# Altium PCB PCB1.PcbDoc (part 4 of 4)
Units mm, origin at the board's own origin, x right, y up, seen from the top; angles counter-clockwise.
Board outline 200 x 55 mm, 4 copper layers (Top Layer, Power Layer, GND Layer, Bottom Layer), stack 1.714 mm thick; 403 components, 272 nets, 1346 pads, 787 vias.
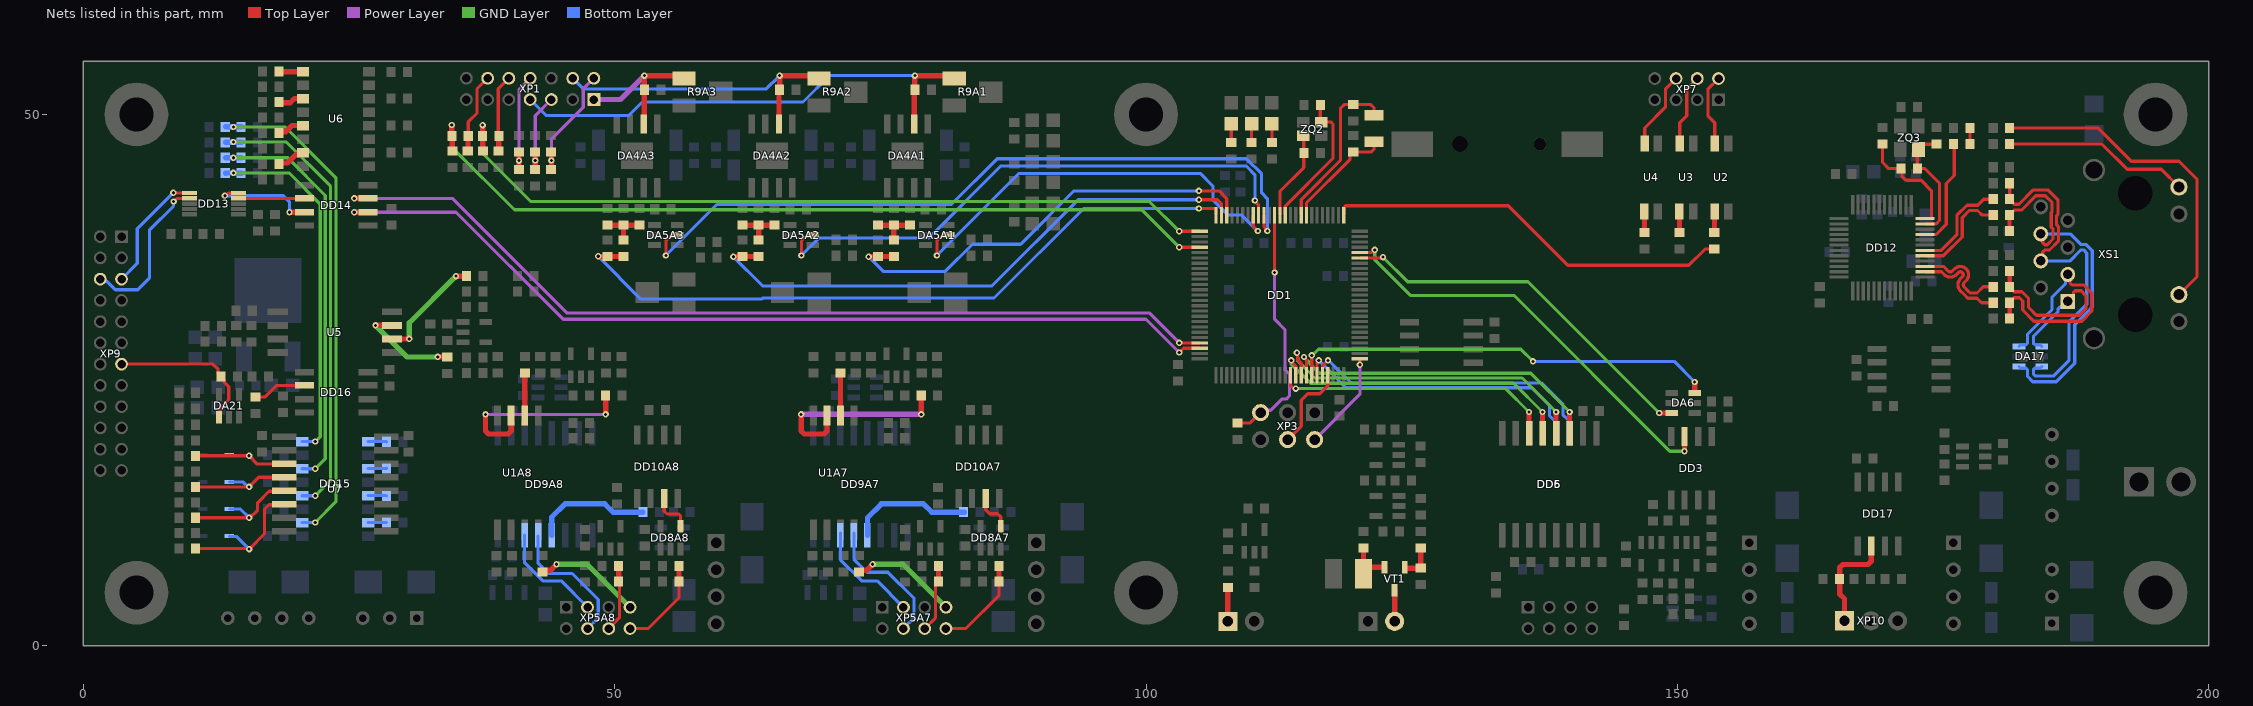
[diagram p6: the nets of this part, all layers, seen from the top]

## Via types
v1: diameter 0.6, hole 0.3, Top Layer to Bottom Layer, tented both sides, 747 vias
v2: diameter 0.6, hole 0.3, Top Layer to Bottom Layer, 36 vias
v3: diameter 0.8, hole 0.4, Top Layer to Bottom Layer, tented both sides, 4 vias

## Nets (pads, with @x,y where several pads share a name; then routed paths per layer and width w, separated by ;. In a path a pad name is that pad's centre, name@x,y a point inside that pad or via, vN(x,y) a via of type N, cw(c..) or ccw(c..) an arc to the next point about the centre after c; other vN are vias at no path point) (continued)
NetDD8A7_4: DD8A7.4 DD10A7.3 | length 3.7
  Top Layer w0.3: DD10A7.3@84.925,13.975 84.925,12.791 85.291,12.425 86.03,12.425 86.325,12.13 DD8A7.4@86.325,11.25
NetDD8A8_4: DD8A8.4 DD10A8.3 | length 3.9
  Top Layer w0.3: DD10A8.3@54.675,13.85 54.675,12.65 54.925,12.4 56.024,12.4 56.2,12.224 DD8A8.4@56.2,11.25
NetDD9A7_12: DD9A7.12 R37A7.1 | length 11.6
  Bottom Layer w0.5: DD9A7.12@73.785,10.4 73.785,12.043 75.092,13.35 79.062,13.35 79.837,12.575 R37A7.1@82.925,12.575
NetDD9A7_13: DD9A7.13 XP5A7.4 | length 12.9
  Bottom Layer w0.3: DD9A7.13@72.515,10.6 72.515,8.16 73.75,6.925 75.7,6.925 78.175,4.45 78.175,2.625 XP5A7.4@77.175,1.625
NetDD9A7_14: DD9A7.14 XP5A7.3 | length 10.3
  Bottom Layer w0.3: DD9A7.14@71.245,10.6 71.245,8.105 73.25,6.1 74.7,6.1 XP5A7.3@77.175,3.625
NetDD9A8_12: DD9A8.12 R37A8.1 | length 11.1
  Bottom Layer w0.5: DD9A8.12@44.07,10.4 44.07,12.091 45.329,13.35 49.069,13.35 49.844,12.575 R37A8.1@52.65,12.575
NetDD9A8_13: DD9A8.13 XP5A8.4 | length 12.7
  Bottom Layer w0.3: DD9A8.13@42.801,10.299 42.801,7.774 43.775,6.8 46,6.8 48.45,4.35 48.45,2.625 XP5A8.4@47.45,1.625
NetDD9A8_14: DD9A8.14 XP5A8.3 | length 10.2
  Bottom Layer w0.3: DD9A8.14@41.53,10.4 41.53,7.819 43.249,6.1 44.975,6.1 XP5A8.3@47.45,3.625
NetDD12_9: DD12.9 R64.2 | length 10.2
  Top Layer w0.3: DD12.9@173.3,38.7 174.05,38.7 174.345,38.7 175.3,39.655 175.3,43.5 176.051,44.251 R64.2@176.051,47.126
NetDD13_4: DD13.4 DD14.6 | length 6.2
  Top Layer w0.3: DD13.4@14.6,42.1 DD14.6@20.8,42.1
NetDD13_5: DD13.5 DD14.7 | length 10.1
  Top Layer w0.3: v1(13.325,42.35) 13.406,42.35 13.656,42.6 DD13.5@14.6,42.6
  Top Layer w0.5: v1(19.4,40.8) DD14.7@20.8,40.8
  Bottom Layer w0.3: v1(13.325,42.35) 18.825,42.35 19.4,41.775 v1(19.4,40.8)
NetDD15_3: DD15.3 R84.2 VD7.1 | length 10.5
  Top Layer w0.3: R84.2@10.575,17.85 10.6,17.875 v1(15.6,17.875) 16.375,17.1 18.87,17.1 DD15.3@18.9,17.13
  Bottom Layer w0.3: VD7.1@13.75,17.94 13.782,17.908 15.567,17.908 v1(15.6,17.875)
NetDD15_4: DD15.4 R78.2 VD6.1 | length 10.7
  Top Layer w0.3: R78.2@10.575,14.95 v1(15.6,14.95) 16.51,15.86 DD15.4@18.9,15.86
  Bottom Layer w0.3: VD6.1@13.75,15.4 15.069,15.4 15.519,14.95 v1(15.6,14.95)
NetDD15_5: DD15.5 R85.2 VD5.1 | length 12
  Top Layer w0.3: R85.2@10.575,12.05 15.681,12.05 16.4,12.769 16.4,13.47 17.476,14.546 18.856,14.546 DD15.5@18.9,14.59
  Bottom Layer w0.3: VD5.1@13.75,12.86 14.79,12.86 v1(15.6,12.05)
NetDD15_6: DD15.6 R79.2 VD4.1 | length 13.8
  Top Layer w0.3: R79.2@10.575,9.15 15.55,9.15 v1(15.6,9.1) 17.05,10.55 17.05,12.85 17.476,13.276 18.856,13.276 DD15.6@18.9,13.32
  Bottom Layer w0.3: VD4.1@13.75,10.3 13.758,10.292 14.408,10.292 v1(15.6,9.1)
NetDD16_6: DD16.6 R99.1 | length 5.1
  Top Layer w0.3: R99.1@16.2,23.4 17.09,23.4 18.19,24.5 DD16.6@20.8,24.5
NetDD17_2: DD17.2 R116.1 XP10.1 | length 9.9
  Top Layer w0.5: XP10.1@165.725,2.35 165.725,4.425 165.275,4.875 165.275,7.357 165.568,7.65 167.946,7.65 168.239,7.943 DD17.2@168.239,9.4
NetR6_2: R6.2 VD1.1 | length 1.8
  Top Layer w0.3: R6.2@108.025,47.35 VD1.1@108.025,49.1
NetR7_2: R7.2 VD2.1 | length 1.7
  Top Layer w0.3: R7.2@109.935,47.35 VD2.1@109.935,49.1
NetR8_2: R8.2 VD3.1 | length 1.8
  Top Layer w0.3: R8.2@111.85,47.31 VD3.1@111.85,49.11
NetR12A1_2: R12A1.2 R13A1.1 R14A1.1 R15A1.1 | length 4.3
  Top Layer w0.5: R13A1.1@74.775,39.575 R12A1.2@76.275,39.575 R15A1.1@77.775,39.575 ; R14A1.1@76.275,38.175 R12A1.2@76.275,39.48
NetR12A2_2: R12A2.2 R13A2.1 R14A2.1 R15A2.1 | length 4.4
  Top Layer w0.5: R13A2.1@62.05,39.575 R12A2.2@63.525,39.575 ; R14A2.1@63.55,38.175 R12A2.2@63.55,39.575 R15A2.1@65.05,39.575
NetR12A3_2: R12A3.2 R13A3.1 R14A3.1 R15A3.1 | length 4.6
  Top Layer w0.5: R13A3.1@49.325,39.575 R12A3.2@50.825,39.575 R15A3.1@52.325,39.575 ; R14A3.1@50.825,38.175 50.825,39.525 R12A3.2@51,39.7
NetR28A7_2: R28A7.2 R31A7.1 XP5A7.6 | length 6.4
  Top Layer w0.3: XP5A7.6@79.175,1.625 80.2,2.65 80.2,5.775 R28A7.2@80.475,6.05
  Top Layer w0.5: R28A7.2@80.475,6.05 R31A7.1@80.475,7.5
NetR28A8_2: R28A8.2 R31A8.1 XP5A8.6 | length 6.3
  Top Layer w0.3: XP5A8.6@49.45,1.625 50.45,2.625 50.45,5.975 R28A8.2@50.375,6.05
  Top Layer w0.5: R28A8.2@50.375,6.05 R31A8.1@50.375,7.5
NetR29A7_2: R29A7.2 R32A7.1 XP5A7.8 | length 9
  Top Layer w0.3: XP5A7.8@81.175,1.625 83.047,1.625 86.175,4.753 R29A7.2@86.175,6.05
  Top Layer w0.5: R29A7.2@86.175,6.05 R32A7.1@86.175,7.5
NetR29A8_2: R29A8.2 R32A8.1 XP5A8.8 | length 8.8
  Top Layer w0.3: XP5A8.8@51.45,1.625 53.175,1.625 56.05,4.5 R29A8.2@56.05,6.05
  Top Layer w0.5: R29A8.2@56.05,6.05 R32A8.1@56.05,7.5
NetR30A7_2: R30A7.2 XP5A7.7 | length 10.2
  Top Layer w0.5: R30A7.2@72.975,6.925 73.15,7.1 73.7,7.1 v1@74.256,7.656
  GND Layer w0.5: v1(74.275,7.675) 77.125,7.675 XP5A7.7@81.175,3.625
NetR30A8_2: R30A8.2 XP5A8.7 | length 10.2
  Top Layer w0.5: R30A8.2@43.225,6.925 43.4,7.1 43.95,7.1 v1@44.506,7.656
  GND Layer w0.5: v1(44.525,7.675) 47.4,7.675 XP5A8.7@51.45,3.625
NetR34A7_1: R34A7.1 U1A7.7 | length 18.7
  Top Layer w0.5: v1(67.55,21.775) 67.55,20.218 67.843,19.925 69.682,19.925 69.975,20.218 U1A7.7@69.975,21.675 ; v1(78.85,21.775) R34A7.1@78.85,23.55
  Power Layer w0.5: v1@67.577,21.775 v1(78.85,21.775)
NetR34A8_1: R34A8.1 U1A8.7 | length 18.7
  Top Layer w0.5: v1(37.85,21.775) 37.85,20.218 38.143,19.925 39.967,19.925 40.26,20.218 U1A8.7@40.26,21.675 ; v1@49.15,21.795 R34A8.1@49.15,23.55
  Power Layer w0.3: v1(37.85,21.775) v1(49.15,21.775)
NetR35A7_1: R35A7.1 U1A7.6 | length 4
  Top Layer w0.5: U1A7.6@71.25,21.675 R35A7.1@71.25,25.65
NetR35A8_1: R35A8.1 U1A8.6 | length 4
  Top Layer w0.5: U1A8.6@41.548,21.675 R35A8.1@41.548,25.638
NetR43_2: R43.2 R45.2 VT1.1 | length 3.5
  Top Layer w0.5: VT1.1@124.346,7.382 124.421,7.307 R45.2@125.871,7.307 ; R45.2@125.85,7.307 R43.2@125.85,9.207
NetR44_2: R44.2 R46.2 VT1.2 | length 4.6
  Top Layer w0.5: R46.2@120.446,6.782 R46.2@120.471,6.807 ; R44.2@120.471,9.207 R46.2@120.471,6.807 ; VT1.2@122.446,7.382 121.046,7.382 R46.2@120.471,6.807
NetR47_1: R47.1 U2.1 | length 2
  Top Layer w0.5: R47.1@153.475,38.875 153.475,38.95 153.5,38.975 U2.1@153.5,40.875
NetR48_1: R48.1 U3.1 | length 2
  Top Layer w0.5: R48.1@150.2,38.875 150.2,38.95 U3.1@150.2,40.875
NetR49_1: R49.1 U4.1 | length 2
  Top Layer w0.5: R49.1@146.9,38.875 U4.1@146.9,40.875
NetR50_1: R50.1 XP8.1 | length 3.2
  Top Layer w0.5: XP8.1@107.7,2.3 R50.1@107.7,5.5
NetR58_1: R58.1 XS1.10 | length 31.2
  Top Layer w0.3: R58.1@181.275,48.712 189.588,48.712 192.7,45.6 197.2,45.6 198.9,43.9 198.9,34.74 XS1.10@197.2,33.04
NetR61_1: R61.1 XS1.12 | length 17.6
  Top Layer w0.3: R61.1@181.275,47.212 189.947,47.212 192.326,44.832 195.538,44.832 XS1.12@197.2,43.17
NetR62_2: R62.2 R64.1 | length 1.5
  Top Layer w0.3: R64.1@177.525,47.212 R62.2@177.525,48.712
NetR80_2: R80.2 U6.1 | length 2.3
  Top Layer w0.3: R80.2@18.425,54.05 R80.2@18.456,54.019
  Top Layer w0.5: R80.2@18.455,54.02 U6.1@20.68,54.02
NetR81_2: R81.2 U6.3 | length 2.4
  Top Layer w0.5: R81.2@18.425,51.1 19.475,51.1 19.88,51.505 20.655,51.505 U6.3@20.68,51.48
NetR82_2: R82.2 U6.5 | length 2.6
  Top Layer w0.5: R82.2@18.425,48.15 18.425,48.2 18.6,48.375 19.075,48.375 19.653,48.953 20.667,48.953 U6.5@20.68,48.94
NetR83_2: R83.2 U6.7 | length 2.8
  Top Layer w0.5: R83.2@18.425,45.25 R83.2@18.425,45.355 ; R83.2@18.425,45.255 18.6,45.43 19.205,45.43 19.97,46.195 20.475,46.195 U6.7@20.68,46.4
NetR88_1: R88.1 U5.7 | length 9.5
  Top Layer w0.5: v1(27.5,30.15) U5.7@29.05,30.15 ; v1(33.35,27.182) R88.1@34.25,27.182
  GND Layer w0.5: v1(27.5,30.15) 30.475,27.175 33.343,27.175 v1(33.35,27.182)
NetR90_1: R90.1 U5.6 | length 10.3
  Top Layer w0.5: U5.6@29.05,28.875 v1(30.675,28.875) ; v1(35.075,34.782) 36.004,34.782 R90.1@36.027,34.759
  GND Layer w0.5: v1(30.675,28.875) 30.675,30.382 v1(35.075,34.782)
NetR95_1: R95.1 U7.1 | length 1.7
  Bottom Layer w0.3: U7.1@26.82,19.21 28.515,19.21 R95.1@28.525,19.2
NetR96_1: R96.1 U7.3 | length 1.7
  Bottom Layer w0.3: U7.3@26.82,16.67 28.495,16.67 R96.1@28.525,16.7
NetR97_1: R97.1 U7.5 | length 1.7
  Bottom Layer w0.3: U7.5@26.82,14.13 28.495,14.13 R97.1@28.525,14.1
NetR98_1: R98.1 U7.7 | length 1.7
  Bottom Layer w0.3: U7.7@26.82,11.59 26.83,11.6 R98.1@28.525,11.6
NetR100_1: R100.1 R104.1 U7.16 | length 34.7
  GND Layer w0.3: v1(14.123,44.5) 19.358,44.5 22.3,41.558 22.3,19.673 21.852,19.225 v1(21.825,19.225)
  Bottom Layer w0.3: U7.16@20.6,19.21 20.608,19.218 21.818,19.218 v1(21.825,19.225)
  Bottom Layer w0.5: R104.1@13.375,44.475 13.388,44.487 14.111,44.487 v1(14.123,44.5) ; v1@14.123,44.475 R100.1@14.875,44.475
NetR101_1: R101.1 R105.1 U7.14 | length 39
  GND Layer w0.3: v1(14.123,45.918) 19.231,45.918 22.775,42.375 22.775,17.6 v1(21.825,16.65)
  Bottom Layer w0.3: U7.14@20.6,16.67 20.61,16.66 21.815,16.66 v1(21.825,16.65)
  Bottom Layer w0.5: R105.1@13.375,45.925 R101.1@14.875,45.925
NetR102_1: R102.1 R106.1 U7.12 | length 43.3
  GND Layer w0.3: v1(14.123,47.4) 19.102,47.4 23.275,43.227 23.275,15.575 v1(21.825,14.125)
  Bottom Layer w0.3: U7.12@20.605,14.125 v1(21.825,14.125)
  Bottom Layer w0.5: R106.1@13.375,47.375 13.387,47.387 14.111,47.387 v1(14.123,47.4) ; v1@14.123,47.375 R102.1@14.875,47.375
NetR103_1: R103.1 R107.1 U7.10 | length 47.5
  GND Layer w0.3: v1(14.123,48.818) 19.005,48.818 23.775,44.049 23.775,13.55 v1(21.825,11.6)
  Bottom Layer w0.3: U7.10@20.6,11.59 20.605,11.595 21.695,11.595 v1@21.7,11.6
  Bottom Layer w0.5: R107.1@13.375,48.825 R103.1@14.875,48.825
NetU2_4: U2.4 XP7.2 | length 6.8
  Top Layer w0.3: U2.4@153.525,47.275 153.525,49.225 152.875,49.875 152.875,52.375 XP7.2@153.875,53.375
NetU3_4: U3.4 XP7.4 | length 6.8
  Top Layer w0.3: U3.4@150.225,47.275 150.225,49.225 150.878,49.878 150.878,52.378 XP7.4@151.875,53.375
NetU4_4: U4.4 XP7.6 | length 7.3
  Top Layer w0.3: U4.4@146.925,47.275 146.925,48.725 148.875,50.675 148.875,52.375 XP7.6@149.875,53.375
NetVT1_3: VT1.3 XP6.2 | length 3
  Top Layer w0.3: XP6.2@123.371,2.257 XP6.2@123.396,2.282
  Top Layer w0.5: XP6.2@123.396,2.282 VT1.3@123.396,5.232
NRST: C21.1 DD1.14 XP3.5 | length 23.4
  Top Layer w0.3: C21.1@108.708,20.975 109.82,20.975 XP3.5@110.785,21.94 ; v1(112.1,35.125) DD1.14@112.1,40.525
  Power Layer w0.3: XP3.5@110.785,21.94 111.016,22.171 111.721,22.171 112.76,23.21 113.185,23.21 113.5,23.525 113.5,25.553 113.075,25.978 113.075,29.75 112.1,30.725 v1(112.1,35.125)
OSC0: C23.1 DD1.12 ZQ2.1 | length 13.3
  Top Layer w0.3: DD1.12@113.1,40.525 113.1,41.375 117.6,45.875 117.6,49.099 117.424,49.275 ZQ2.1@116.5,49.275 116.4,49.375 C23.1@116.4,50.875
OSC1: C25.1 DD1.13 ZQ2.3 | length 8.4
  Top Layer w0.3: DD1.13@112.6,40.525 112.6,42.75 114.85,45 114.85,46.225 C25.1@114.775,46.3 ; ZQ2.3@114.8,47.975 114.85,47.925 C25.1@114.85,46.375
OSC32_0: C22.1 DD1.8 ZQ1.1 | length 10.5
  Top Layer w0.3: DD1.8@115.1,40.525 115.1,41.675 119.207,45.782 119.207,46.2 119.482,46.475 121.2,46.475 121.45,46.725 ZQ1.1@121.45,47.425
OSC32_1: C24.1 DD1.9 ZQ1.2 | length 15.7
  Top Layer w0.3: DD1.9@114.6,40.525 114.6,41.978 118.3,45.678 118.3,50.575 118.65,50.925 C24.1@119.5,50.925 121.15,50.925 121.45,50.625 ZQ1.2@121.45,49.925
PD1_A: R10A3.2 R11A3.1 XP1.2 | length 11
  Top Layer w0.5: R10A3.2@44.05,44.85 v1(44.05,45.662) R11A3.1@44.05,46.475
  Power Layer w0.3: v1(44.05,45.662) 44.05,47.675 47.05,50.675 47.05,52.4 XP1.2@48.05,53.4
PD1_ADC: C32A3.1 DD1.25 R14A3.2 | length 66.4
  Top Layer w0.3: v1(48.45,36.645) v1@48.46,36.635 ; R14A3.2@50.815,36.635 R14A3.2@50.825,36.625 ; v1(104.975,41.15) 106.6,41.15 DD1.25@106.6,40.525
  Top Layer w0.5: v1@48.46,36.635 R14A3.2@50.815,36.635
  Bottom Layer w0.3: v1(48.45,36.645) 52.472,32.623 63.825,32.623 63.926,32.725 85.7,32.725 94.125,41.15 v1(104.975,41.15)
PD1_C: C27A3.2 DA4A3.2 R9A3.1 XP1.1 | length 14.1
  Top Layer w0.5: DA4A3.2@52.75,49.105 52.775,49.13 52.775,52.3 C27A3.2@52.8,52.325 v1(52.8,53.65) 52.819,53.631 56.269,53.631 R9A3.1@56.525,53.375
  Power Layer w0.5: XP1.1@48.05,51.4 50.55,51.4 v1(52.8,53.65)
PD1_ERR: DA5A3.5 DD1.16 | length 70.3
  Top Layer w0.3: v1(54.825,36.725) 54.825,38.114 55.236,38.525 55.775,38.525 DA5A3.5@55.9,38.65 ; DD1.16@111.1,40.525 111.1,39.431 111.425,39.106 v1(111.425,39.025)
  Bottom Layer w0.3: v1(54.825,36.725) 59.625,41.525 81.693,41.525 85.993,45.825 109.449,45.825 110.875,44.399 110.875,42.612 111.425,42.062 v1(111.425,39.025)
PD2_A: R10A2.2 R11A2.1 XP1.5 | length 8
  Top Layer w0.5: R10A2.2@42.525,44.85 v1(42.525,45.662) R11A2.1@42.525,46.475
  Power Layer w0.3: v1(42.525,45.662) 42.525,49.875 XP1.5@44.05,51.4
PD2_ADC: C32A2.1 DD1.24 R14A2.2 | length 54.1
  Top Layer w0.3: v1(104.975,41.975) 106.725,41.975 107.1,41.6 DD1.24@107.1,40.525
  Top Layer w0.5: v1(61.175,36.6) 62.05,36.6 C32A2.1@62.075,36.575 ; C32A2.1@62.05,36.625 R14A2.2@63.55,36.625
  Bottom Layer w0.3: v1(61.175,36.6) 63.925,33.85 85.5,33.85 93.625,41.975 v1(104.975,41.975)
PD2_C: C27A2.2 DA4A2.2 R9A2.1 XP1.4 | length 28.8
  Top Layer w0.5: DA4A2.2@65.466,49.105 65.466,52.266 C27A2.2@65.525,52.325 v1(65.525,53.65) 68.9,53.65 R9A2.1@69.225,53.325
  Bottom Layer w0.3: XP1.4@46.05,53.4 47.05,52.4 64.275,52.4 v1(65.525,53.65)
PD2_ERR: DA5A2.5 DD1.17 | length 53.4
  Top Layer w0.3: v1(67.575,36.725) 67.575,38.095 68.005,38.525 68.733,38.525 DA5A2.5@68.883,38.675 ; v1(110.25,41.9) 110.25,41.819 110.6,41.469 DD1.17@110.6,40.525
  Bottom Layer w0.3: v1(67.575,36.725) 69.214,38.364 79.539,38.364 86.325,45.15 109.438,45.15 110.25,44.338 v1(110.25,41.9)
PD3_A: R10A1.2 R11A1.1 XP1.8 | length 9.8
  Top Layer w0.5: R10A1.2@41,44.85 v1(41,45.65) R11A1.1@41,46.475
  Power Layer w0.3: v1(41,45.65) 41,52.35 XP1.8@42.05,53.4
PD3_ADC: C32A1.1 DD1.23 R14A1.2 | length 41.6
  Top Layer w0.3: v1(104.975,42.8) 106.881,42.8 107.6,42.081 DD1.23@107.6,40.525
  Top Layer w0.5: v1(73.9,36.6) C32A1.1@74.775,36.6 ; C32A1.1@74.775,36.625 R14A1.2@76.275,36.625
  Bottom Layer w0.3: v1(73.9,36.6) 75.275,35.225 81.125,35.225 83.675,37.775 88.2,37.775 93.225,42.8 v1(104.975,42.8)
PD3_C: C27A1.2 DA4A1.2 R9A1.1 XP1.7 | length 46.8
  Top Layer w0.5: DA4A1.2@78.2,49.105 78.2,52.275 C27A1.2@78.25,52.325 v1(78.25,53.65) 78.269,53.631 81.694,53.631 R9A1.1@81.95,53.375
  Bottom Layer w0.3: XP1.7@42.05,51.4 43.55,49.9 51.345,49.9 52.615,51.17 67.72,51.17 70.2,53.65 v1(78.25,53.65)
PD3_ERR: DA5A1.5 DD1.18 | length 40.9
  Top Layer w0.3: v1(80.325,36.725) 80.325,38.12 80.73,38.525 81.343,38.525 DA5A1.5@81.492,38.675 ; DD1.18@110.1,40.525 110.1,39.45 v1(110.525,39.025)
  Bottom Layer w0.3: v1(80.325,36.725) 88.05,44.45 105.108,44.45 106.296,43.263 106.296,41.979 107.75,40.525 109.025,40.525 v1(110.525,39.025)
PMO_HW: DA21.1 R113.2 XP9.13 | length 14.6
  Top Layer w0.3: XP9.13@3.6,26.5 12.2,26.5 12.684,26.016 12.684,25.621 13.23,25.075 13.23,24.834 13.688,24.376 13.688,23.177 12.883,22.372 12.883,21.625 DA21.1@12.758,21.5
POWER_IND: DD1.1 R47.2 | length 38.6
  Top Layer w0.3: DD1.1@118.6,40.525 118.6,41.224 118.776,41.4 134.1,41.4 139.7,35.8 151.075,35.8 152.6,37.325 R47.2@153.475,37.325
PS_A: DD1.96 DD3.3 | length 40.4
  Top Layer w0.3: DD1.96@120.125,37 121.211,37 121.461,37.25 v1(121.525,37.25)
  Top Layer w0.5: v1(150.675,18.3) 150.678,18.303 150.678,19.697 DD3.3@150.681,19.7
  GND Layer w0.3: v1(121.525,37.25) 121.525,36.325 124.875,32.975 134.625,32.975 149.3,18.3 v1(150.675,18.3)
PS_D: DA6.3 DD1.95 | length 35.5
  Top Layer w0.3: DD1.95@120.125,36.5 122.144,36.5 122.219,36.575 v1(122.3,36.575)
  Top Layer w0.5: v1(148.3,21.9) DA6.3@149.475,21.9
  GND Layer w0.3: v1(122.3,36.575) 124.625,34.25 135.95,34.25 v1(148.3,21.9)
PS_ERR1: DD1.65 DD5.14 | length 26.4
  Top Layer w0.3: DD1.65@113.6,25.475 113.6,24.514 113.855,24.259 114.043,24.259 v1(114.1,24.202) ; v1(136.042,22) v1@136.044,21.998 ; DD5.14@136.044,20.012 DD5.14@136.046,20.01
  Top Layer w0.5: DD5.14@136.044,20.012 v1@136.044,21.998
  GND Layer w0.3: v1(114.1,24.202) 114.102,24.2 133.842,24.2 v1(136.042,22)
PS_ERR2: DD1.66 DD5.13 | length 29.4
  Top Layer w0.3: v1(113.675,26.85) 113.732,26.793 113.732,26.692 114.1,26.324 DD1.66@114.1,25.475 ; v1(137.312,22) v1@137.314,21.998 ; DD5.13@137.314,20.012 DD5.13@137.316,20.01
  Top Layer w0.5: DD5.13@137.314,20.012 v1@137.314,21.998
  GND Layer w0.3: v1(113.675,26.85) 113.632,26.807 113.632,26.551 115.485,24.698 134.614,24.698 v1(137.312,22)
PS_ERR3: DD1.67 DD5.12 | length 31.3
  Top Layer w0.3: v1(114.2,27.575) 114.257,27.518 114.257,27.116 114.275,27.099 114.275,26.924 114.6,26.599 DD1.67@114.6,25.475
  Top Layer w0.5: DD5.12@138.586,20.01 v1(138.586,22)
  GND Layer w0.3: v1(114.2,27.575) 114.257,27.518 114.257,27.116 114.275,27.099 114.275,26.825 115.906,25.194 135.392,25.194 v1(138.586,22)
PS_ON: DD1.68 DD5.11 | length 31
  Top Layer w0.3: v1(114.87,27.177) 114.87,27.096 115.1,26.866 DD1.68@115.1,25.475
  Top Layer w0.5: DD5.11@139.856,20.01 v1(139.856,22)
  GND Layer w0.3: v1(114.87,27.177) 115.463,26.584 115.463,26.498 116.317,25.644 136.212,25.644 v1(139.856,22)
PS_SEL_D: DA6.6 DD1.69 | length 40.4
  Top Layer w0.3: DD1.69@115.6,25.475 115.6,27.32 v1(115.605,27.325)
  Top Layer w0.5: DA6.6@151.625,23.8 v1(151.625,24.825)
  GND Layer w0.3: v1(115.605,27.325) 115.661,27.325 116.235,27.9 135.277,27.9 v1(136.419,26.758)
  Bottom Layer w0.3: v1(136.419,26.758) 149.692,26.758 v1(151.625,24.825)
RD_N: DA17.4 R54.1 R57.2 XS1.6 | length 35.9
  Top Layer w0.3: R57.2@181.275,40.525 181.275,40.575 181.698,40.998 182.379,40.998 183.729,42.347 184.635,42.347 185.25,41.732 185.25,40.806 185.19,40.746 185.19,39.394 185.35,39.234 185.35,38.281 184.806,37.737 184.558,37.737 184.382,37.913 184.382,38.575 XS1.6@184.2,38.757
  Top Layer w0.381: R54.1@181.275,39.025 R57.2@181.275,40.525
  Bottom Layer w0.3: DA17.4@182.15,26.275 182.275,26.15 182.772,26.15 182.948,25.974 182.948,25.346 183.448,24.846 185.646,24.846 187.4,26.6 187.4,30.217 188.892,31.708 188.892,31.762 189.035,31.905 189.035,37.167 188.437,37.764 187.948,37.764 186.955,38.757 XS1.6@184.2,38.757
RD_P: DA17.3 R55.1 R60.2 XS1.4 | length 35
  Top Layer w0.3: R55.1@181.275,43.525 R60.2@181.275,42.025 181.275,41.975 181.698,41.552 182.15,41.552 183.499,42.901 184.864,42.901 185.804,41.962 185.804,40.576 185.69,40.462 185.69,39.601 185.85,39.441 185.85,38.074 185.013,37.237 184.558,37.237 184.382,37.062 184.382,36.4 XS1.4@184.2,36.217
  Bottom Layer w0.3: XS1.4@184.2,36.217 186.955,36.217 187.986,37.249 188.223,37.249 188.519,36.953 188.519,32.119 186.846,30.446 186.846,26.829 185.417,25.4 183.678,25.4 183.502,25.576 183.502,25.974 183.678,26.15 184.175,26.15 DA17.3@184.3,26.275
Rx232: DD1.48 DD14.2 | length 86.5
  Top Layer w0.3: v1(103.125,27.6) 103.525,28 DD1.48@105.075,28
  Top Layer w0.5: v1(25.5,40.8) DD14.2@26.8,40.8
  Power Layer w0.3: v1(25.5,40.8) 35.075,40.8 45.15,30.725 100,30.725 v1(103.125,27.6)
Rx232_HW: DD13.7 XP9.6 | length 15.3
  Top Layer w0.3: v1(8.5,41.8) 8.526,41.8 8.826,42.1 DD13.7@10,42.1
  Bottom Layer w0.3: XP9.6@1.6,34.5 1.985,34.5 2.219,34.267 2.252,34.267 3.019,33.5 5.123,33.5 6.219,34.596 6.219,39.1 8.493,41.374 8.493,41.793 v1(8.5,41.8)
RxCAN: DD1.70 DD6.5 | length 27.8
  Top Layer w0.3: DD1.70@116.1,25.475 116.1,26.619 116.25,26.769 v1(116.25,26.85)
  Bottom Layer w0.3: v1(116.25,26.85) 117.372,25.728 118.812,24.288 136.299,24.288 137.956,22.63 137.956,21.668 138.436,21.188 138.436,20.16 DD6.5@138.586,20.01
RXI_N: DD12.5 R57.1 | length 9.4
  Top Layer w0.3: DD12.5@173.3,36.7 175.031,36.7 176.8,38.469 176.8,40.293 177.465,40.958 178.243,40.958 178.675,40.525 R57.1@179.725,40.525
RXI_P: DD12.6 R60.1 | length 9.5
  Top Layer w0.3: DD12.6@173.3,37.2 174.824,37.2 176.3,38.676 176.3,40.5 177.257,41.458 178.258,41.458 178.825,42.025 R60.1@179.725,42.025
SWCLK: DD1.76 XP3.2 | length 9.4
  Top Layer w0.3: v1(120.125,26.45) DD1.76@120.125,27
  Power Layer w0.3: XP3.2@115.865,19.4 120.125,23.66 v1(120.125,26.45)
SWDIO: DD1.72 XP3.4 | length 8.3
  Top Layer w0.3: XP3.4@113.325,19.4 114.6,20.675 114.6,23.09 115.231,23.721 116.343,23.721 117.1,24.478 DD1.72@117.1,25.475
T1: R17A4.2 R18A4.1 XP1.10 | length 7.3
  Top Layer w0.3: R18A4.1@39.055,47.972 39.055,52.405 XP1.10@40.05,53.4
  Top Layer w0.5: R17A4.2@39.078,46.572 39.103,46.597 39.103,47.947 R18A4.1@39.128,47.972
T1_ADC: C36A4.1 DD1.26 R18A4.2 | length 75.6
  Top Layer w0.3: v1(103.125,39) DD1.26@105.075,39
  Top Layer w0.5: v1(37.578,48.997) R18A4.2@37.578,47.972 37.603,47.947 37.603,46.597 C36A4.1@37.628,46.572
  GND Layer w0.3: v1@37.65,49 37.65,46.275 42.125,41.8 100.325,41.8 v1(103.125,39)
T2: R17A5.2 R18A5.1 XP1.12 | length 7.6
  Top Layer w0.3: R18A5.1@36.225,47.975 36.225,49.3 37.05,50.125 37.05,52.4 XP1.12@38.05,53.4
  Top Layer w0.5: R17A5.2@36.175,46.575 36.2,46.6 36.2,47.95 R18A5.1@36.225,47.975
T2_ADC: C36A5.1 DD1.29 R18A5.2 | length 78.8
  Top Layer w0.3: v1(103.125,37.5) DD1.29@105.075,37.5
  Top Layer w0.5: v1(34.675,49) R18A5.2@34.675,47.975 34.725,47.925 C36A5.1@34.725,46.575
  GND Layer w0.3: v1(34.675,49) 34.675,46.925 40.575,41.025 99.6,41.025 v1(103.125,37.5)
TD_N: DA17.6 R52.1 R56.2 XS1.3 | length 25.1
  Top Layer w0.3: R56.2@181.275,32.507 181.454,32.507 181.698,32.751 182.197,32.751 182.5,32.447 182.5,31.599 183.554,30.546 188.046,30.546 189,31.5 189,33.183 188.229,33.954 187.125,33.954 186.949,34.13 186.949,34.738 XS1.3@186.74,34.947
  Top Layer w0.381: R52.1@181.275,30.778 R56.2@181.275,32.277
  Bottom Layer w0.3: DA17.6@182.15,28.175 182.275,28.3 182.772,28.3 182.948,28.476 182.948,29.331 185.25,31.633 185.25,32.812 186.531,34.093 186.531,34.738 XS1.3@186.74,34.947
TD_P: DA17.1 R53.1 R59.2 XS1.1 | length 20.6
  Top Layer w0.3: R59.2@181.275,33.778 181.275,33.728 181.698,33.305 182.426,33.305 183.054,32.676 183.054,31.829 183.783,31.1 187.817,31.1 188.446,31.729 188.446,32.954 188,33.4 187.447,33.4 187.271,33.225 187.271,32.939 XS1.1@186.74,32.407
  Top Layer w0.381: R59.2@181.275,33.778 R53.1@181.275,35.278
  Bottom Layer w0.3: DA17.1@184.3,28.175 184.175,28.3 183.678,28.3 183.502,28.476 183.502,29.102 185.804,31.404 185.804,31.682 185.98,31.857 186.19,31.857 XS1.1@186.74,32.407
Tx232: DD1.47 DD14.3 | length 86.5
  Top Layer w0.3: v1(103.125,28.5) 104.362,28.5 DD1.47@105.075,28.5
  Top Layer w0.5: v1(25.5,42.1) DD14.3@26.8,42.1
  Power Layer w0.3: v1(25.5,42.1) 34.724,42.1 45.499,31.325 100.3,31.325 v1(103.125,28.5)
Tx232_HW: DD13.6 XP9.5 | length 11.6
  Top Layer w0.3: v1@8.481,42.608 9.963,42.608 DD13.6@9.971,42.6
  Bottom Layer w0.3: XP9.5@3.6,34.508 5.082,35.99 5.082,39.246 v1@8.473,42.637
  other v1: 8.481,42.637
TxCAN: DD1.71 DD6.6 | length 28.4
  Top Layer w0.3: DD1.71@116.6,25.475 116.6,26.325 v1(117.125,26.85)
  Bottom Layer w0.3: v1(117.125,26.85) 117.175,26.85 118.06,25.965 119.287,24.738 137.212,24.738 139.231,22.719 139.231,21.753 139.706,21.278 139.706,20.16 DD6.6@139.856,20.01
TXO_N: DD12.2 R56.1 | length 9.4
  Top Layer w0.3: DD12.2@173.3,35.2 174.827,35.2 174.838,35.2 175.042,34.996 175.114,34.924 ; 175.115,34.923 ccw(c175.681,35.488) 176.247,34.923 176.437,35.112 cw(c176.631,34.918) 176.826,35.112 cw(c176.631,34.918) 176.826,34.723 176.636,34.534 ccw(c177.202,33.968) 176.636,33.402 177.033,33.005 177.338,32.7 177.44,32.7 178.2,32.7 178.623,32.277 R56.1@179.725,32.277
TXO_P: DD12.3 R59.1 | length 9.5
  Top Layer w0.3: DD12.3@173.3,35.7 175.045,35.7 175.186,35.559 175.396,35.349 175.469,35.276 ccw(c175.681,35.488) 175.893,35.276 176.083,35.466 cw(c176.631,34.918) 177.179,35.466 cw(c176.631,34.918) 177.181,34.371 176.989,34.18 ccw(c177.202,33.968) 176.989,33.756 177.387,33.359 177.545,33.2 177.94,33.2 178.2,33.2 178.778,33.778 R59.1@179.725,33.778
XSCI: DD12.12 R63.2 R65.1 | length 11
  Top Layer w0.3: R65.1@169.3,47.2 169.3,45.5 169.9,44.9 R63.2@171.025,44.9 171.149,44.776 171.149,44.151 171.5,43.8 172.934,43.8 173.9,42.834 173.9,40.2 DD12.12@173.3,40.2
XSCO: C85.1 DD12.11 R63.1 ZQ3.1 | length 11.4
  Top Layer w0.3: DD12.11@173.3,39.7 174.345,39.7 174.665,40.02 174.665,43.535 173.3,44.9 R63.1@172.575,44.9 172.575,46.575 ZQ3.1@172.7,46.7 172.7,46.75 173.15,47.2 C85.1@174.375,47.2
pads on no net: DA1.3 DA1.5 DA1.8 DA2.5 DA2.8 DA4A1.5 DA4A2.5 DA4A3.5 DA18.5 DA19.3 DA19.5 DA19.8 DD1.51 DD1.52 DD1.83 DD1.84 DD1.85 DD1.86 DD1.87 DD1.97 DD1.98 DD4.1 DD6.1 DD6.4 DD6.10 DD6.14 DD6.15 DD7A7.1 DD7A8.1 DD8A7.1 DD8A8.1 DD9A7.7 DD9A7.11 DD9A8.7 DD9A8.11 DD11.1 DD12.18 DD12.19 DD12.21 DD12.34 DD12.35 DD12.37 DD12.38 DD12.39 DD12.40 DD12.41 DD12.42 DD12.43 DD12.44 DD15.7 XP1.14 XP3.6 XP7.7 XP7.8 XS1. XS1.7 XS1.8

## Polygon pours and split planes (outlines as drawn)
GND on Top Layer "NONET_L-01_P-001" (solid, remove dead copper, pour order 24): 25.5,55 32,55 32,9.3 25.5,9.3
GND_DRVA7 on Top Layer "GND_DRVA7_L01_P023" (solid, remove dead copper, pour order 23): 66.75,15.5 66.75,0 88.125,0 88.125,15.5
GND_DRVA8 on Top Layer "GND_DRVA8_L01_P022" (solid, remove dead copper, pour order 22): 39.75,15.5 36.325,12.075 36.325,0 58,0 58,15.5
AGND on Top Layer "AGND_L01_P017" (solid, remove dead copper, pour order 17): 34,55 34,22.275 38.275,18 93,18 93,30.5 88.375,35.125 88.375,55
GND_HW on Top Layer "GND_HW_L01_P008" (solid, remove dead copper, pour order 8): 9,0 9,6.5 6.5,9 0,9 0,46 6,46 9,49 9,55 22,55 22,7.545 17.55,3.095 17.55,0
GND on Top Layer "GND_L01_P006" (solid, remove dead copper, pour order 6): 190.825,15.875 190.825,22.125 193.2,24.5 200,24.5 200,45.497 193,45.497 190.5,47.997 190.5,54.997 158.75,54.997 158.75,45.75 155.5,42.5 146.25,42.5 143,45.75 143,55 104.375,55 104.375,48.375 102,46 97.875,46 95.5,48.375 95.5,55 90.625,55 90.625,35.25 94.917,30.958 94.917,17.95 94.917,17.5 94.917,17.434 104.375,7.976 104.375,0 128.5,0 128.5,13.5 133,18 152,18 159.925,18 164.175,13.75 181.425,13.75 183.55,15.875
GND_FS on Top Layer "NONET_L-01_P-001" (solid, remove dead copper, pour order 25): 164.175,11 162.5,9.325 162.5,0 174.25,0 174.25,11
GND_PS on Top Layer "GND_PS_L01_P013" (solid, remove dead copper, pour order 13): 131.125,0 131.125,13.25 133.375,15.5 155.081,15.5 155.081,0
AGND_HW on Top Layer "NONET_L-01_P-001" (solid, pour order 21): 12.566,29.195 12.566,27.056 13.496,26.126 16.874,26.126 16.874,24.87 18.098,24.87 18.098,26.126 19.253,27.28 19.253,29.195
GND_DRVA7 on Bottom Layer "GND_DRVA7_L04_P001" (solid, remove dead copper, pour order 1): 66.75,15.5 66.75,0.003 88.125,0.003 88.125,15.5
GND on Bottom Layer "GND_L04_P009" (solid, remove dead copper, pour order 9): 200,24.5 193.2,24.5 190.61,21.91 178.96,21.91 174.25,17.2 174.25,13.75 164.175,13.75 159.925,18 133,18 128.5,13.5 128.5,0 104.4,0 104.4,7.95 94.35,18 38.374,18 33,12.626 33,9.3 25.5,9.3 25.5,19 25.5,55 32,55 32,26.5 82.5,26.5 90.625,34.625 90.625,55 95.5,55 95.5,48.375 97.877,45.998 101.998,45.998 104.375,48.375 104.375,55 143,55 143,45.75 146.25,42.5 155.5,42.5 158.75,45.75 158.75,55 190.5,55 190.5,49 193.502,45.998 200,45.998
AGND on Bottom Layer "AGND_L04_P005" (solid, remove dead copper, pour order 5): 34,55 34,28.5 52.499,28.5 73.5,28.5 82.25,28.5 88.375,34.625 88.375,55
GND_DRVA8 on Bottom Layer "GND_DRVA8_L04_P003" (solid, remove dead copper, pour order 3): 39.75,15.5 36.325,12.075 36.325,0 58,0 58,15.5
GND_HW on Bottom Layer "GND_HW_L04_P015" (solid, remove dead copper, pour order 15): 9,0 9,6.5 6.5,9 0,9 0,46 6,46 9,49 9,55 22,55 22,8.75 18.788,8.75 17.55,7.512 17.55,0
GND_FS on Bottom Layer "NONET_L-01_P-001" (solid, remove dead copper, pour order 19): 164.175,11 162.5,9.325 162.5,0 174.25,0 174.25,11
GND_PS on Bottom Layer "GND_PS_L04_P012" (solid, remove dead copper, pour order 12): 131.125,0 131.125,13.25 133.375,15.5 155.081,15.5 155.081,0
GND on GND Layer "GND_L03_P018" (solid, remove dead copper, pour order 18): 25.5,55 32,55 32,26.5 75.875,26.5 78.325,28.95 84.95,28.95 90.626,34.626 90.626,55 95.5,55 95.5,48.375 97.877,45.998 101.998,45.998 104.375,48.375 104.375,55 143,55 143,45.744 146.247,42.497 155.497,42.497 158.75,45.75 158.75,55 190.5,55 190.5,49 193.502,45.998 200,45.998 200,24.5 193.175,24.5 190.825,22.15 190.825,15.875 183.55,15.875 181.425,13.75 164.175,13.75 159.925,18 133,18 128.5,13.5 128.5,0 104.4,0 104.4,7.95 94.35,18 38.51,18 33,12.49 33,9.3 25.5,9.3
AGND on GND Layer "AGND_L03_P004" (solid, remove dead copper, pour order 4): 34,55 34,28.5 82.25,28.5 88.375,34.625 88.375,55
GND_FS on GND Layer "NONET_L-01_P-001" (solid, remove dead copper, pour order 20): 164.175,11 162.5,9.325 162.5,0 174.25,0 174.25,11
GND_DRVA7 on GND Layer "GND_DRVA7_L03_P000" (solid, remove dead copper, pour order 0): 66.75,14.25 66.75,0 88.125,0 88.125,14.25
GND_DRVA8 on GND Layer "GND_DRVA8_L03_P002" (solid, remove dead copper, pour order 2): 38.5,14.25 36.325,12.075 36.325,0 58,0 58,14.25
GND_HW on GND Layer "GND_HW_L03_P016" (solid, remove dead copper, pour order 16): 9,0 9,6.5 6.5,9 0,9 0,46 6,46 9,49 9,55 22,55 22,7.55 17.55,3.1 17.55,0

## Keep-outs
Top Layer:
  lines w0.2: 172.875,13.45 172.875,20.925 174.013,22.063 181.5,22.063 ; 155.861,26.65 156.2,26.311 159.305,26.311 159.656,26.662 159.656,27.951 159.294,28.312 156.211,28.312 155.861,27.962 155.861,26.65 ; 155.871,18.389 156.21,18.05 159.315,18.05 159.674,18.409 159.674,19.681 159.304,20.051 156.221,20.051 155.871,19.701 155.871,18.389
GND Layer:
  lines w0.2: 154.8,42.775 154.8,27.711 156.23,26.281 159.274,26.281 159.656,26.662 159.656,27.944 157.1,30.5 157.1,44.65 ; 155.871,17.874 155.871,19.701 156.221,20.051 159.304,20.051 159.674,19.681 159.674,17.874
Bottom Layer:
  lines w0.2: 155.871,17.874 155.871,27.973 156.211,28.312 159.287,28.312 159.675,27.925 159.675,17.874

## Other copper
Top Layer:
  pour cut-out: 184.725,21 184.112,20.387 184.112,19.363 184.682,18.793 185.768,18.793 186.35,19.375 186.35,20.375 185.725,21
  pour cut-out: 13.075,3.7 12.462,3.087 12.462,2.063 13.075,1.45 14.075,1.45 14.7,2.075 14.7,3.075 14.075,3.7
GND Layer:
  pour cut-out: 98.75,11.125 98.75,13.5 128.75,13.5 128.75,11.125
  pour cut-out: 184.725,21 184.1,20.375 184.1,19.375 184.725,18.75 185.725,18.75 186.35,19.375 186.35,20.375 185.725,21
  pour cut-out: 13.075,3.7 12.45,3.075 12.45,2.075 13.075,1.45 14.075,1.45 14.7,2.075 14.7,3.075 14.075,3.7
Bottom Layer:
  pour cut-out: 13.075,3.7 12.45,3.075 12.45,2.075 13.075,1.45 14.075,1.45 14.7,2.075 14.7,3.075 14.075,3.7

## Silkscreen, mask and mechanical layers (free items; w line width, h text height)
Top Overlay:
  drawing of 28 lines, arcs and shapes, not listed
  text "SCALE" at 56.498,47.439 h1.3
  text "SCALE" at 69.361,47.439 h1.3
  text "SCALE" at 82.235,47.439 h1.3
  text "OVERPOW" at 52.795,28.641 h1.3
  text "OVERPOW" at 65.52,28.641 h1.3
  text "OVERPOW" at 78.345,28.616 h1.3
  text "Low-profile laser / Control board / Rev.4" at 137.975,24.325 h3
Bottom Overlay:
  lines w0.2: 9.688,25.337 9.85,25.175 ; 9.85,25.175 9.875,25.175 9.85,25.175
Top Assy:
  circle w0.2: c100,50 r1.6
  circle w0.2: c100,5 r1.6
  circle w0.2: c5,50 r1.6
  circle w0.2: c195,50 r1.6
  circle w0.2: c195,5 r1.6
  circle w0.2: c5,5 r1.6
Bottom Assy:
  circle w0.2: c100,50 r1.6
  circle w0.2: c100,5 r1.6
  circle w0.2: c5,50 r1.6
  circle w0.2: c195,50 r1.6
  circle w0.2: c195,5 r1.6
  circle w0.2: c5,5 r1.6
Board Outline:
  the board outline again, w0.2